# Altium PCB 板.PcbDoc (part 1 of 3)
Units mil, origin at the board's own origin, x right, y up, seen from the top; angles counter-clockwise.
Board outline 8500 x 4400 mil, 4 copper layers (Top Layer, 02gnd, 03vcc, Bottom Layer); 131 components, 485 nets, 1153 pads, 930 vias.
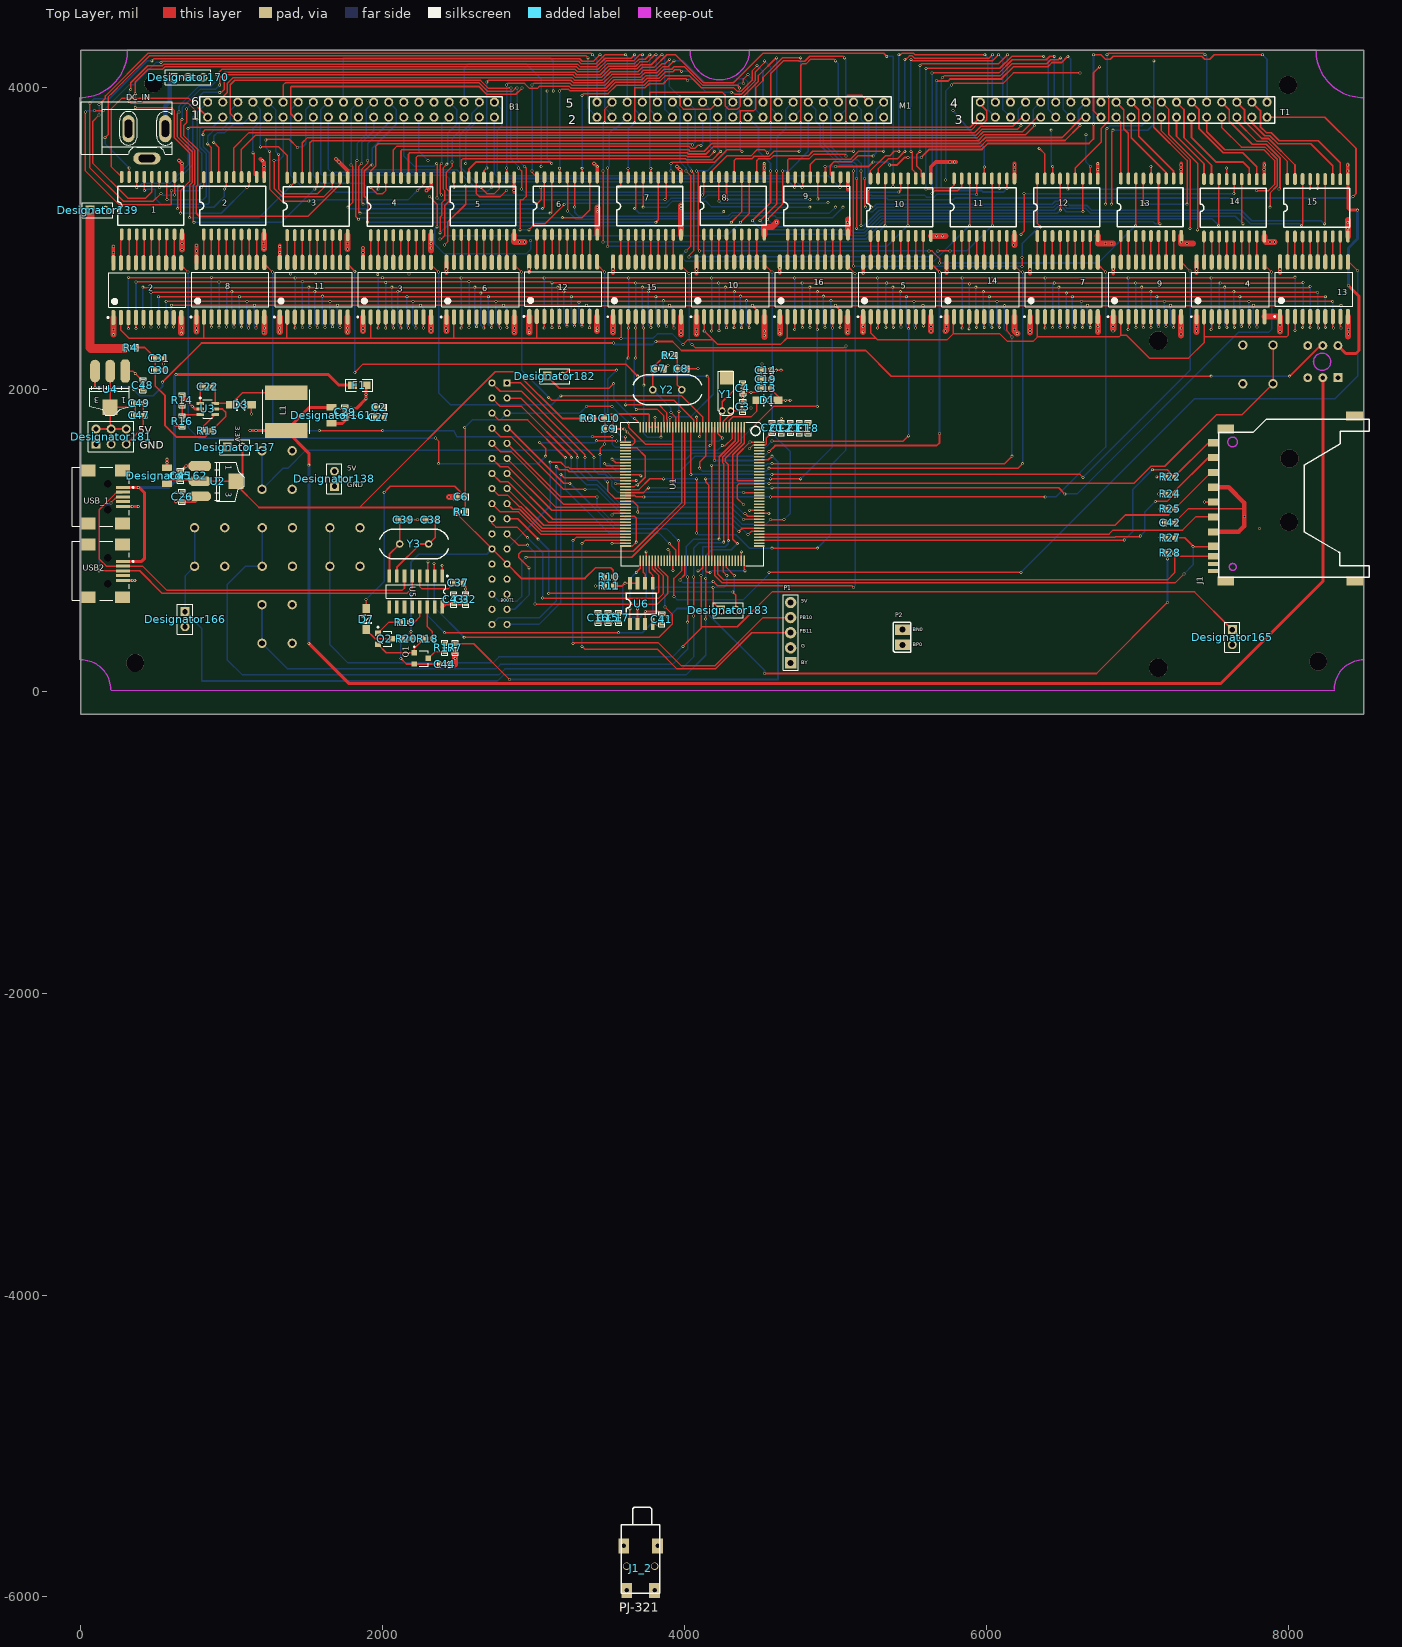
[diagram p0: Top Layer view]
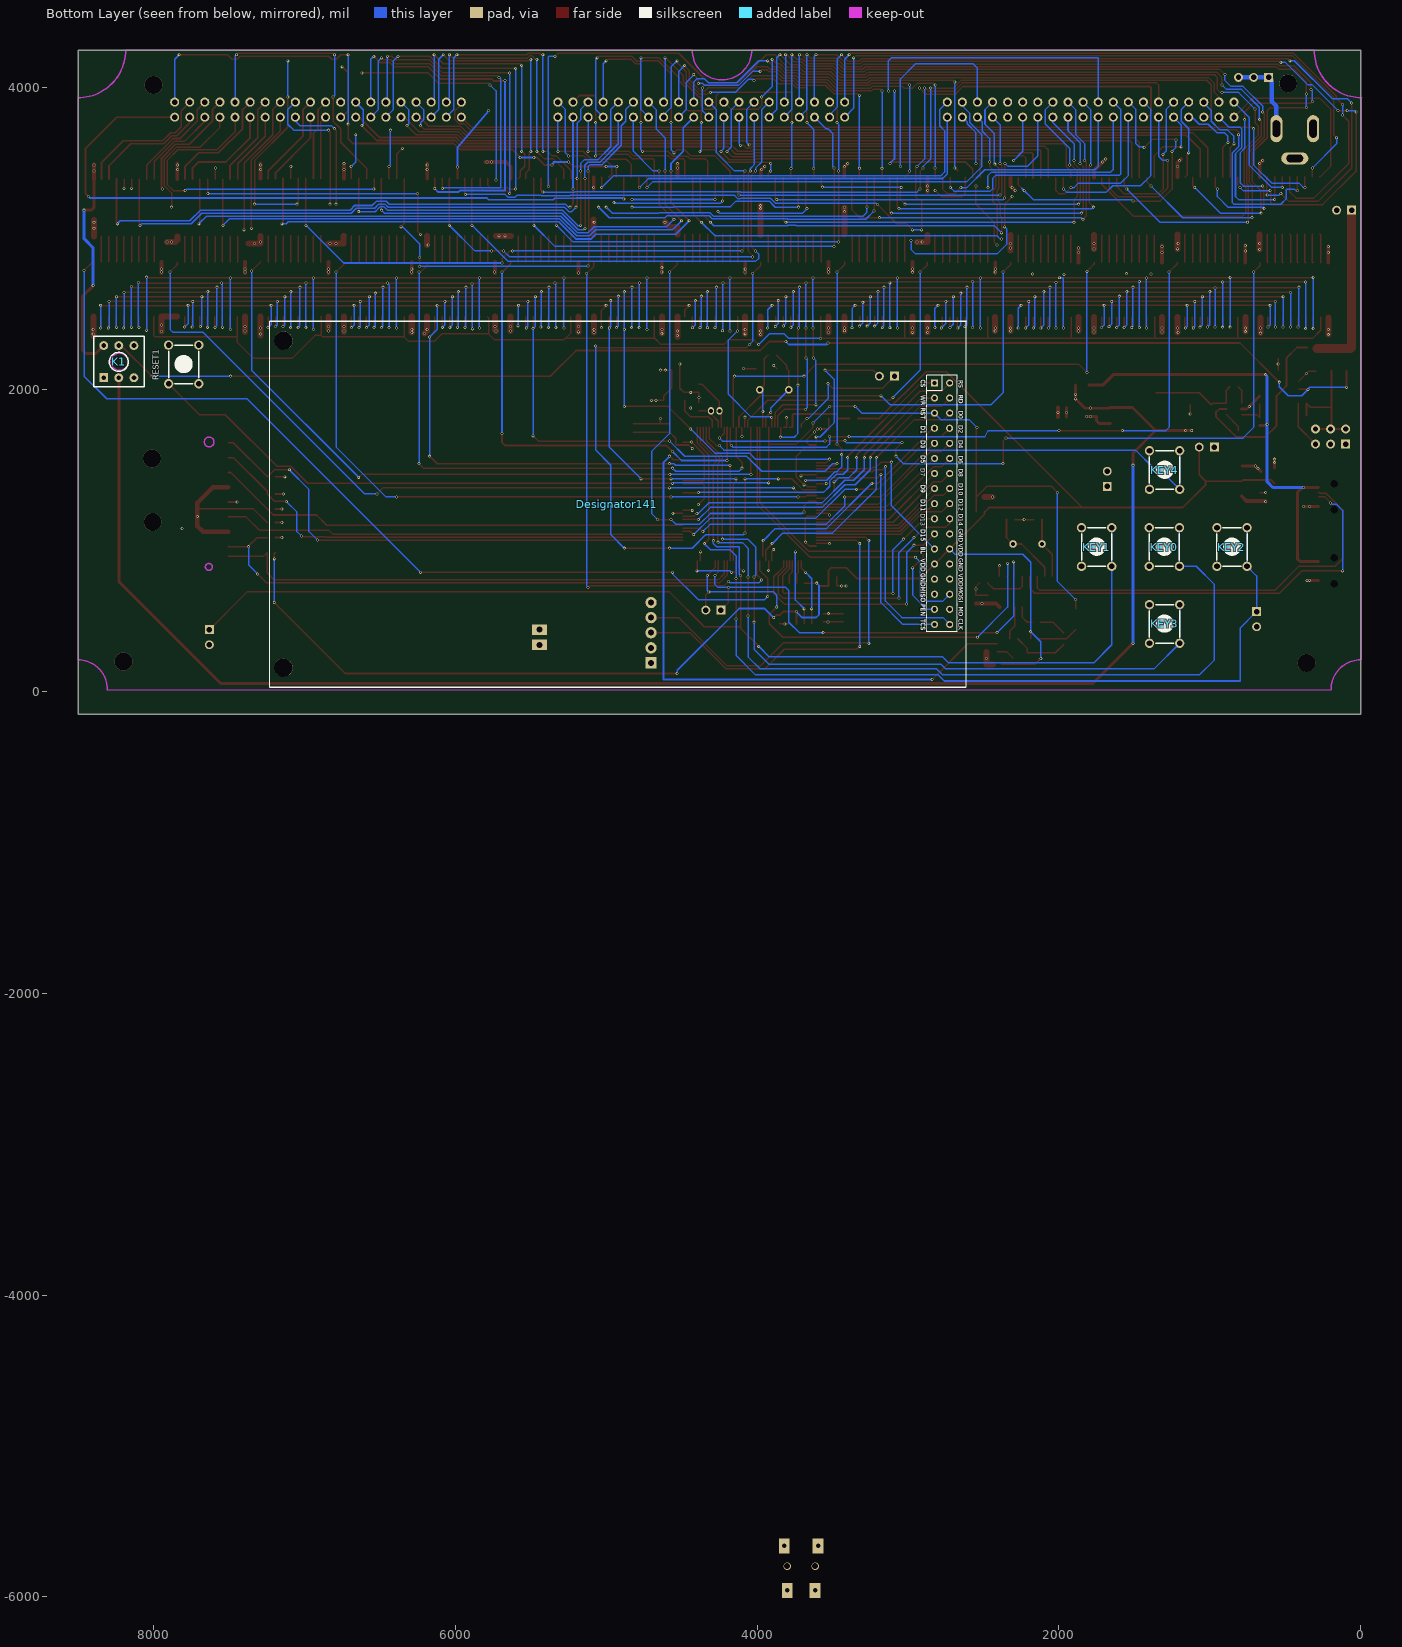
[diagram p1: Bottom Layer view, seen from below]
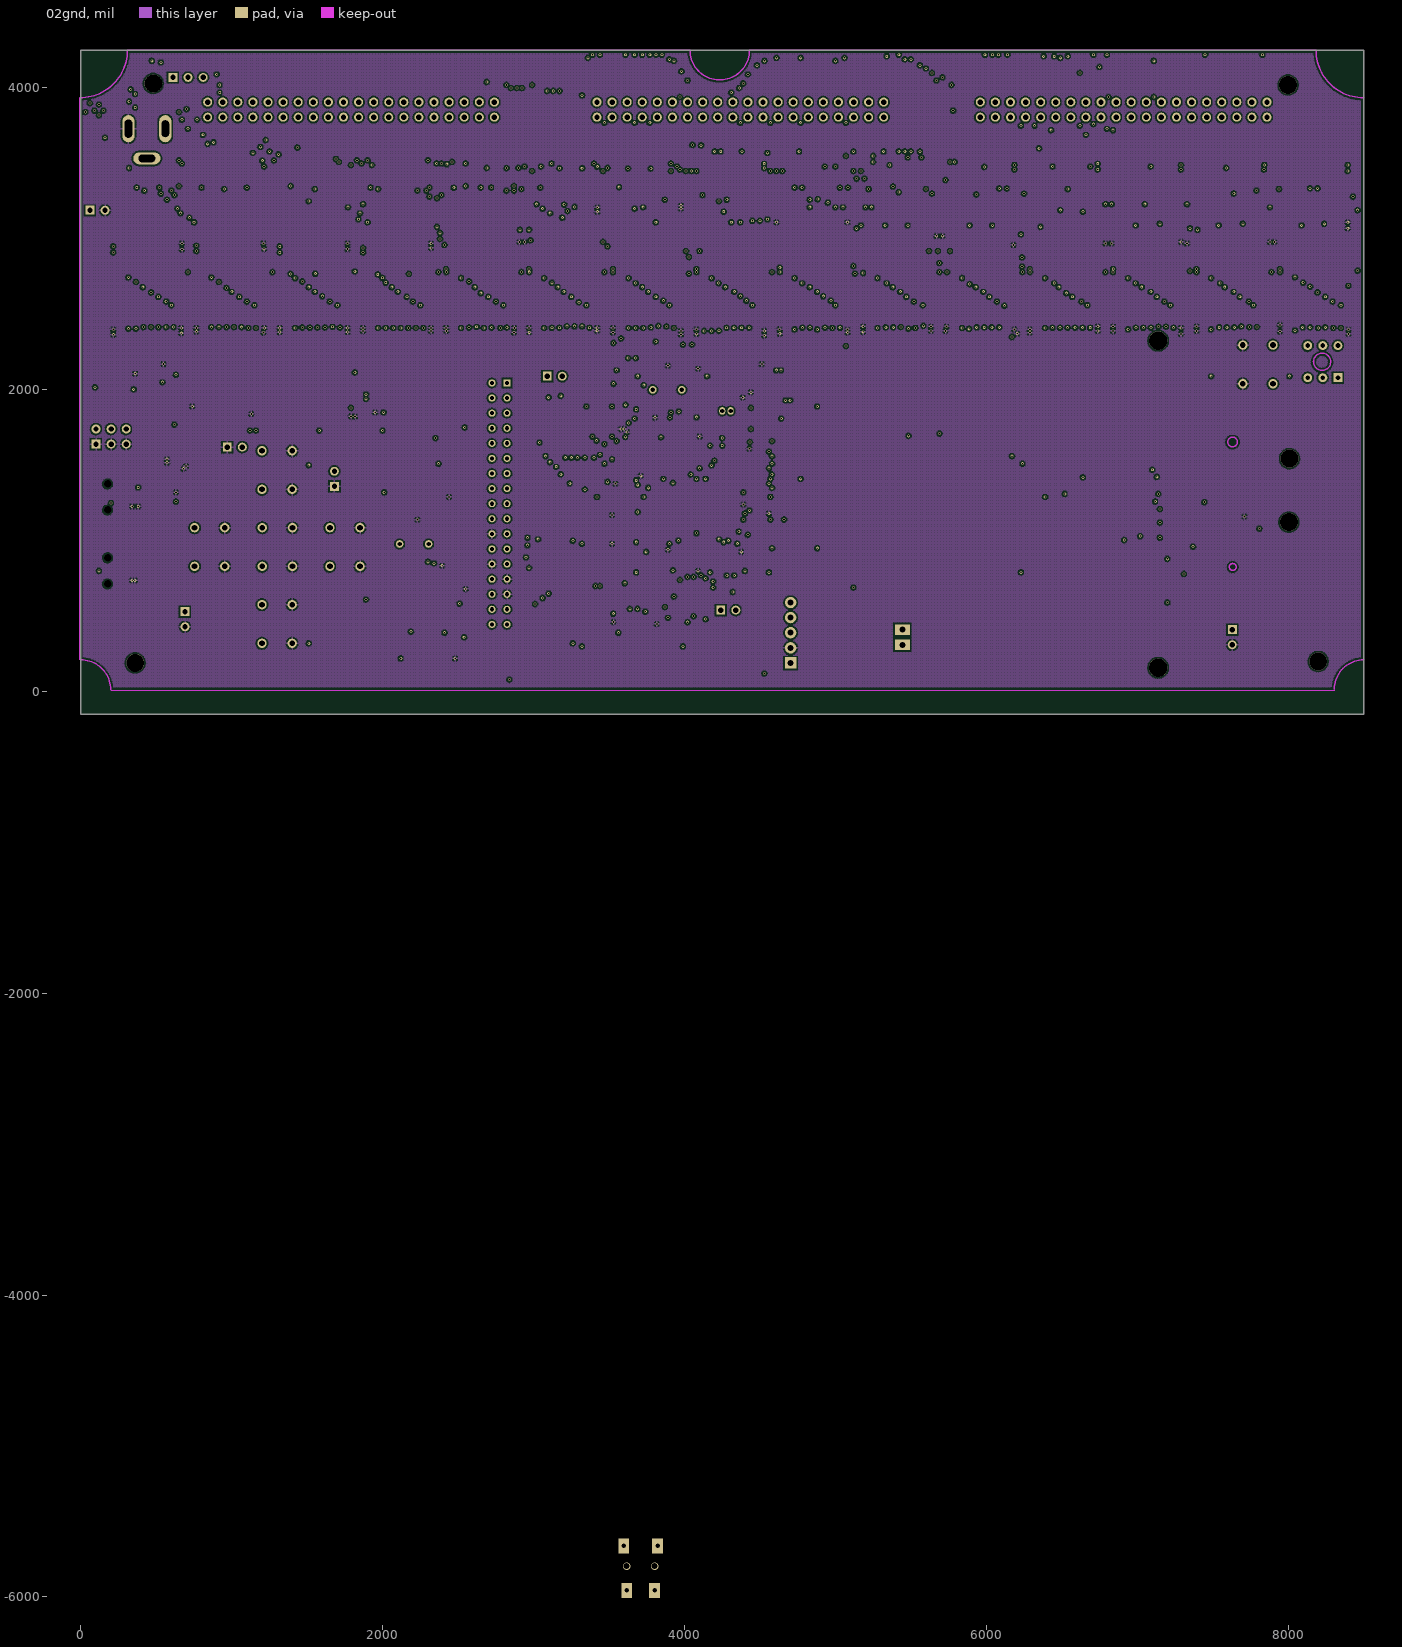
[diagram p2: 02gnd]
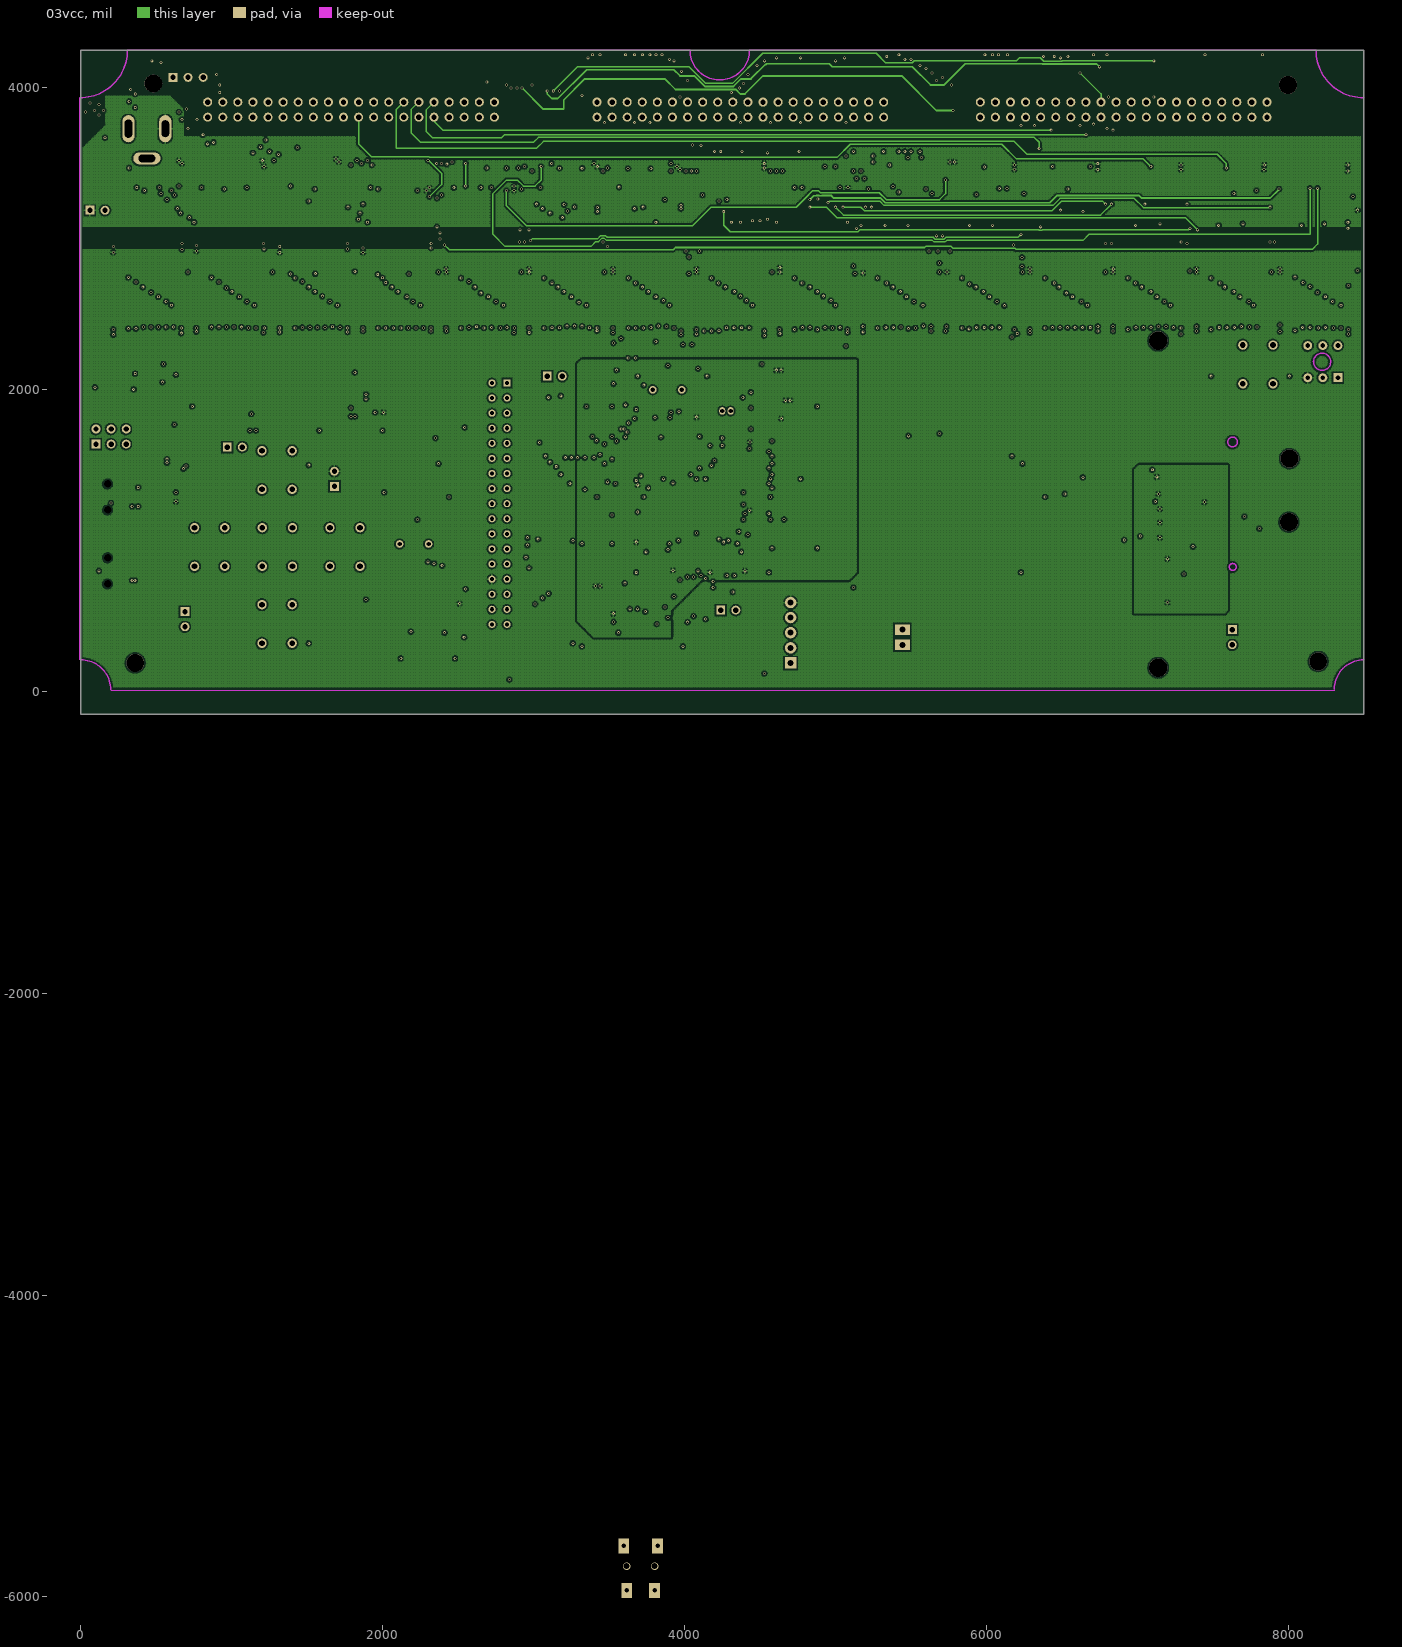
[diagram p3: 03vcc]

## Layer stack, top to bottom
Top Layer: signal copper 1.4
Dielectric: core 12.6, FR-4, Dk 4.8
02gnd: signal copper 1.4
Dielectric: prepreg 12.6, FR-4, Dk 4.8
03vcc: signal copper 1.4
Dielectric: core 12.6, FR-4, Dk 4.8
Bottom Layer: signal copper 1.4

## Board outline
0,4250 8500,4250 8500,-150 0,-150 0,4250

## Design rules (kind name [scope] priority, off if disabled: settings)
Clearance POLY [(INPolygon)] p1: gap=10
Clearance VIA-PLOY [(IsVia) vs INPOLY] p2: gap=5
Clearance ALL [All] p3: gap=4.5
ComponentClearance [All] p1: gap=0 collisioncheckmode=3 verticalgap=0 showdistances=FALSE
FabricationTestPointUsage TestPointUsage [All] p1: valid=0 allowmultiple=FALSE
FabricationTestpoint Testpoint [(IsPad And (OnTopLayer Or OnBottomLayer))] p1: side=3 testpointundercomponent=TRUE minsize=40 maxsize=100 preferedsize=60 minholesize=0 maxholesize=40 preferedholesize=32 testpointgrid=1 allowsidetop=TRUE allowsidebottom=TRUE usegrid=TRUE gridtolerance=0.01
PolygonConnect [All] p1: connectstyle=Relief reliefconductorwidth=10 reliefentries=4 polygonreliefangle="90 Angle" airgapwidth=10
RoutingCorners [All] p1: cornerstyle=Round minsetback=100 maxsetback=100
RoutingVias [All] p1: holewidth=11.81 width=19.68 viastyle="Through Hole" minholewidth=11.81 minwidth=19.68 maxholewidth=27.56 maxwidth=27.56
SolderMaskExpansion [All] p1: expansion=4
Width [All] p1: maxlimit=196.85 minlimit=10 preferedwidth=19.68 toplayer_prefwidth=10 midlayer1_maxwidth=118.11 midlayer2_maxwidth=118.11 bottomlayer_prefwidth=10 minimp=50.000000 maximp=50.000000 favimp=50.000000
24 further rules are at their usual default settings.

## Classes and differential pairs
component class SHEET2: 2 3 4 5 6 8 9 10 11 12 13 14 15 16
component class SHEET3: D3 D7 K1 L1 Q2
component class Sheet4: C41 C42 C44 KEY0 KEY1 KEY2 R22 R24 R25 R27 R28 U6
component class SHEET1: C2 C3 C4 C7 C8 C9 C10 C11 D1 R2 R3 Y1
net class POWER: NetD4_1 VBTN VCC3.3 VCC3.3M VCC5 VDDA VUSB

## Components (designator, comment, footprint, x,y, rotation, side; value= is the part's Value field where it differs from the comment)
1 "uln2803" sol-18 270,3030 r90 top (schematic designator FD1)
2 "74HC573" SO20_M 440,2660 r90 top
2 "uln2803" sol-18 814,3029 r90 top (schematic designator FD7)
3 "74HC573" SO20_M 2094.98,2662.99 r90 top
3 "uln2803" sol-18 1367,3025 r90 top (schematic designator FD10)
4 "74HC573" SO20_M 7618.56,2664.99 r90 top
4 "uln2803" sol-18 1921,3024 r90 top (schematic designator FD2)
5 "74HC573" SO20_M 5408.85,2664.99 r90 top
5 "uln2803" sol-18 2471,3027 r90 top (schematic designator FD5)
6 "74HC573" SO20_M 2647.41,2662.99 r90 top
6 "uln2803" sol-18 3022,3028 r90 top (schematic designator FD11)
7 "74HC573" SO20_M 6513.71,2664.99 r90 top
7 "uln2803" sol-18 3576.3,3027 r90 top (schematic designator FD14)
8 "74HC573" SO20_M 990.12,2662.99 r90 top
8 "uln2803" sol-18 4128.3,3029 r90 top (schematic designator FD9)
9 "74HC573" SO20_M 7066.13,2664.99 r90 top
9 "uln2803" sol-18 4683.3,3028 r90 top (schematic designator FD15)
10 "74HC573" SO20_M 4303.99,2664.99 r90 top
10 "uln2803" sol-18 5232.3,3020 r90 top (schematic designator FD4)
11 "74HC573" SO20_M 1542.55,2662.99 r90 top
11 "uln2803" sol-18 5786.3,3020 r90 top (schematic designator FD13)
12 "74HC573" SO20_M 3196,2667 r90 top
12 "uln2803" sol-18 6338.3,3019 r90 top (schematic designator FD6)
13 "74HC573" SO20_M 8171.3,2666 r90 top
13 "uln2803" sol-18 6891.3,3020 r90 top (schematic designator FD8)
14 "74HC573" SO20_M 5961.28,2664.99 r90 top
14 "uln2803" sol-18 7442.3,3016 r90 top (schematic designator FD3)
15 "74HC573" SO20_M 3751.56,2664.99 r90 top
15 "uln2803" sol-18 7995.3,3016 r90 top (schematic designator FD12)
16 "74HC573" SO20_M 4856.42,2664.99 r90 top
B1 "dubangxian" 杜邦线插脚 840,3906.42 r0 top
C2 "104" 0603P 1978.3,1883 r0 top
C3 "10" 0603P 4386.3,1887 r270 top
C4 "10" 0603P 4386.17,2010 r90 top
C6 "104" 0603P 2520,1290 r0 top
C7 "22" 0603P 3830,2140 r180 top
C8 "22" 0603P 3980,2140 r180 top
C9 "10uF" 0603P 3500,1740 r180 top
C10 "104" 0603P 3500,1810 r180 top
C11 "104" 0603P 4761.06,1746.5 r270 top
C12 "104" 0603P 4641.06,1746.5 r270 top
C13 "104" 0603P 4540,2010 r180 top
C14 "104" 0603P 4540,2130 r180 top
C15 "104" 0603P 3493.3,489 r270 top
C16 "104" 0603P 3428.3,489 r270 top
C17 "104" 0603P 3563.3,489 r270 top
C18 "104" 0603P 4821.06,1746.5 r270 top
C19 "104" 0603P 4540,2070 r180 top
C20 "104" 0603P 4581.06,1747.5 r270 top
C21 "104" 0603P 4700.06,1747.5 r270 top
C22 "103" 0603P 840,2020 r0 top
C26 "104" 0603P 670,1290 r270 top
C27 "104" 0603P 1978.3,1818 r0 top
C29 "104" 0603P 1750,1850 r90 top
C30 "10u" 0603P 520,2130 r180 top
C31 "104" 0603P 520,2210 r180 top
C32 "104" 0603P 2550,610 r90 top
C37 "104" 0603P 2500,720 r180 top
C38 "22" 0603P 2320,1140 r0 top
C39 "22" 0603P 2140,1140 r180 top
C41 "104" 0603P 3850,480 r270 top
C42 "104" 0603P 7220,1120 r180 top
C43 "10u" 0603P 2470,610 r90 top
C44 "104" 0603P 2410,180 r180 top
C45 "104" 0603P 660,1430 r270 top (schematic designator C26)
C47 "104" 0603P 386.7,1830 r0 top (schematic designator C26)
C48 "104" 0603P 410,2030 r90 top (schematic designator C26)
C49 "104" 0603P 386.7,1910 r0 top (schematic designator C26)
D1 "1N4148" DIODE_SOP 4620,1930 r180 top
D3 "SS14" DIODE_SOP 1130,1900 r180 top
D7 "1N4148" DIODE_SOP 1890,550 r270 top
DC_IN "POWER" DC10B 140,3560 r0 top
Designator137 "" HDR1X2#1 970,1620 r0 top
Designator138 "" HDR1X2#1 1680,1360 r90 top
Designator139 "" HDR1X2#1 60,3190 r0 top
Designator141 "" db2*17-4.3 2824.3,2045 r270 bottom locked
Designator161 "220uf钽电容" C1206 1660,1830 r270 top
Designator162 "220uf钽电容" C1206 570,1430 r90 top
Designator165 "" HDR1X2#1 7630,410 r270 top
Designator166 "" HDR1X2#1 690,530 r270 top
Designator170 "" HDR1X3 610,4070 r0 top
Designator181 "" HDR2X3 100,1640 r0 top
Designator182 "" HDR1X2#1 3090,2090 r0 top
Designator183 "" HDR1X2#1 4240,540 r0 top
F1 "1000mA" 0805 1800,2030 r0 top
J1 "SDCARD" SDCARD_L 7503.3,1550 r90 top
J1_2 "PJ-321" PCBComponent_1 32611.3,19659 r0 top (schematic designator J1)
K1 "BUTTON" BTN8.5*8.5 8330,2080 r90 bottom
KEY0 "KEY_M" KEY_M 1401.65,830 r90 bottom
KEY1 "KEY_M" KEY_M 1850,830 r90 bottom
KEY2 "KEY_M" KEY_M 953.3,830 r90 bottom
KEY3 "KEY_M" KEY_M 1400,320 r90 bottom (schematic designator KEY0)
KEY4 "KEY_M" KEY_M 1400,1340 r90 bottom (schematic designator KEY0)
L1 "4.7uH" L_SOP74 1360,1730 r90 top
M1 "dubangxian" 杜邦线插脚 3420,3906.42 r0 top
P1 "Header 5" HDR1X5 4703.3,190 r90 top locked
P2 "Header 2" HDR1X2#2 5443.3,410 r270 top locked
Q1 "S8550" SOT-23R 2250,220 r270 top
Q2 "S8050" SOT-23R 2010,350 r270 top
R1 "10K" 0603P 2520,1190 r180 top
R2 "1M" 0603P 3900,2230 r0 top
R3 "10R" 0603P 3360,1810 r180 top
R4 "0" 0603P 330,2280 r180 top (schematic designator R1)
R7 "10K" 0603P 2480,290 r270 top
R10 "0" 0603P 3500,760 r180 top
R11 "0" 0603P 3500,700 r180 top
R14 "9.53K" 0603P 670,1930 r90 top
R15 "100K" 0603P 840,1730 r180 top
R16 "49.9K" 0603P 670,1790 r90 top
R17 "1K" 0603P 2410,290 r90 top
R18 "1K" 0603P 2300,350 r180 top
R19 "1K" 0603P 2150,460 r180 top
R20 "10K" 0603P 2160,350 r180 top
R22 "47k" 0603P 7218.3,1423 r180 top
R24 "47k" 0603P 7220,1310 r180 top
R25 "47k" 0603P 7220,1210 r180 top
R27 "47k" 0603P 7220,1020 r180 top
R28 "47k" 0603P 7220,920 r180 top
RESET1 "KEY_M" KEY_M 7900,2040 r90 bottom
T1 "dubangxian" 杜邦线插脚 5960,3906.42 r0 top
U1 "STM32F103ZET6" LQFP144 4395.75,1751.68 r270 top
U2 "AMS1117-3.3" AMS1117 788.3,1494.03 r270 top
U3 "MP2359" SOT-23-6 790,1910 r0 top
U4 "AMS1117-3.3" AMS1117 294,2123.88 r180 top (schematic designator U2)
U5 "CH340G" SOP16M 2219.3,663 r180 top
U6 "W25Q128" SOIC-8 3638.3,448 r90 top
USB2 "USB" USB/SM0.8-6H5 -30,800 r180 top (schematic designator USB1)
USB_1 "USB" USB/SM0.8-6H5 -30,1290 r180 top
Y1 "32.768K" XTAL32 4250,1860 r90 top
Y2 "8MHz" XTAL_US 3790,2000 r0 top
Y3 "12.288MHz" XTAL_US 2304.3,978 r180 top

## Footprints (in the part's own frame and the unit in brackets; to place one, negate y for a bottom-side part, rotate by r counter-clockwise, add the part's x,y. Pads: shape width x height; smd on the part's side, far side on the other; paste and mask are expansions set on the pad)
0603P [mil]
  rect 30x30 smd: 1(-27,0) 2(27.5,-0.06)
  silkscreen extent -50,-20 50,20
0805 [mil]
  rect 60x50 smd: 1(0,0) 2(90,0)
  silkscreen extent -45,-40 135,40
AMS1117 [mil]
  oct 65x150 smd: 1(0.03,-0.06)
  oval 65x150 smd: 2(100.03,-0.06) 3(200.03,-0.06)
  rect 100x100 smd: 4(100.03,239.94)
  silkscreen extent -26,100 234,293
BTN8.5*8.5 [mm]
  rect 1.5x1.5 hole 0.8: 1(0,0)
  round 1.5 hole 0.8: 2(0,-2.54) 3(0,-5.08) 4(5.4,-5.08) 5(5.4,-2.54) 6(5.4,0)
  silkscreen extent -1.55,-6.79 6.95,1.71
C1206 [mm] "Chip Capacitor, Body 3.2x1.6mm, IPC High Density"
  rect 1.1x1.7 smd: 1(-1.35,0) 2(1.35,0)
  silkscreen extent -0.4,-0.75 0.4,0.75, body extent -1.7,-0.9 1.7,0.9, height 1.3
db2*17-4.3 [mm]
  rect 1.2x1.2 hole 0.7: 1(-0.002,0.006)
  round 1.2 hole 0.7: 2(-0.002,2.546) 3(2.538,0.006) 4(2.538,2.546) 5(5.08,0) 6(5.078,2.546) 7(7.62,0) 8(7.62,2.54) 9(10.158,0.006) 10(10.158,2.546) 11(12.698,0.006) 12(12.698,2.546) 13(15.238,0.006) 14(15.238,2.546) 15(17.778,0.006) 16(17.778,2.546) 17(20.318,0.006) 18(20.318,2.546) 19(22.858,0.006) 20(22.858,2.546) 21(25.398,0.006) 22(25.398,2.546) 23(27.938,0.006) 24(27.938,2.546) 25(30.478,0.006) 26(30.478,2.546) 27(33.018,0.006) 28(33.018,2.546) 29(35.558,0.006) 30(35.558,2.546) 31(38.098,0.006) 32(38.098,2.546) 33(40.638,0.006) 34(40.638,2.546)
  round 3.1 hole 3.1: ""(-7.125,-109.596) ""(47.925,-109.596)
  silkscreen extent -10.4,-111.89 51.25,5.33
DC10B [mil]
  oval 80x180 hole 50 slot 110 at 90 deg: 1(419.09,170)
  oval 80x180 hole 50 slot 120 at 90 deg: 2(175,170)
  oval 180x80 hole 50 slot 110 at 0 deg: 3(297.05,-26.85)
  silkscreen extent -138,0 465,350
DIODE_SOP [mm]
  rect 1.5x1.3 smd: 1(0,0) 2(3.556,0)
  silkscreen extent 1.14,-1.02 2.56,1.02
HDR1X2#1 [mm] "Connector; Header; 2 Position"
  rect 1.5x1.5 hole 0.9: 1(0,0)
  round 1.5 hole 0.9: 2(2.54,0)
  silkscreen extent -1.27,-1.27 3.81,1.27
HDR1X2#2 [mm]
  rect 1.778x2.54 hole 1.016: 1(0,0) 2(2.54,0)
  silkscreen extent -1.27,-1.27 3.81,1.27
HDR1X3 [mm] "Connector; Header; 3 Position"
  rect 1.5x1.5 hole 0.9: 1(0,0)
  round 1.5 hole 0.9: 2(2.54,0) 3(5.08,0)
  silkscreen extent -1.27,-1.27 6.35,1.27
HDR1X5 [mil]
  rect 75x75 hole 40: 1(0,0)
  round 75 hole 40: 2(100,0) 3(200,0) 4(300,0) 5(400,0)
  silkscreen extent -50,-50 450,50
HDR2X3 [mm] "Connector; Header; 3x2 Position"
  rect 1.5x1.5 hole 0.9: 1(0,0)
  round 1.5 hole 0.9: 2(0,2.54) 3(2.54,0) 4(2.54,2.54) 5(5.08,0) 6(5.08,2.54)
  silkscreen extent -1.27,-1.27 6.35,3.81
KEY_M [mil]
  round 62 hole 38: 1(0,0) 1(255.9,0) 2(0,-200) 2(255.9,-200)
  silkscreen extent 0,-200 255,0
L_SOP74 [mm]
  rect 2.5x7.2 smd: 1(0,0) 2(6.35,0)
  silkscreen extent -0.51,-3.94 6.89,3.94
LQFP144 [mil]
  rect 70.87x10 smd: 1(-0.35,0.02) 2(-0.35,-19.66) 3(-0.35,-39.35) 4(-0.35,-59.03) 5(-0.35,-78.72) 6(-0.35,-98.4) 7(-0.35,-118.09) 8(-0.35,-137.77) 9(-0.35,-157.46) 10(-0.35,-177.14) 11(-0.35,-196.83) 12(-0.35,-216.51) 13(-0.35,-236.2) 14(-0.35,-255.88) 15(-0.35,-275.57) 16(-0.35,-295.25) 17(-0.35,-314.94) 18(-0.35,-334.62) 19(-0.35,-354.31) 20(-0.35,-373.99) 21(-0.35,-393.68) 22(-0.35,-413.36) 23(-0.35,-433.05) 24(-0.35,-452.73) 25(-0.35,-472.42) 26(-0.35,-492.1) 27(-0.35,-511.79) 28(-0.35,-531.47) 29(-0.35,-551.16) 30(-0.35,-570.84) 31(-0.35,-590.53) 32(-0.35,-610.21) 33(-0.35,-629.9) 34(-0.35,-649.58) 35(-0.35,-669.27) 36(-0.35,-688.95) 73(885.47,-688.95) 74(885.47,-669.27) 75(885.47,-649.58) 76(885.47,-629.9) 77(885.47,-610.21) 78(885.47,-590.53) 79(885.47,-570.84) 80(885.47,-551.16) 81(885.47,-531.47) 82(885.47,-511.79) 83(885.47,-492.1) 84(885.47,-472.42) 85(885.47,-452.73) 86(885.47,-433.05) 87(885.47,-413.36) 88(885.47,-393.68) 89(885.47,-373.99) 90(885.47,-354.31) 91(885.47,-334.62) 92(885.47,-314.94) 93(885.47,-295.25) 94(885.47,-275.57) 95(885.47,-255.88) 96(885.47,-236.2) 97(885.47,-216.51) 98(885.47,-196.83) 99(885.47,-177.14) 100(885.47,-157.46) 101(885.47,-137.77) 102(885.47,-118.09) 103(885.47,-98.4) 104(885.47,-78.72) 105(885.47,-59.03) 106(885.47,-39.35) 107(885.47,-19.66) 108(885.47,0.02)
  rect 10x70.87 smd: 37(98.07,-787.38) 38(117.76,-787.38) 39(137.44,-787.38) 40(157.13,-787.38) 41(176.81,-787.38) 42(196.5,-787.38) 43(216.18,-787.38) 44(235.87,-787.38) 45(255.55,-787.38) 46(275.24,-787.38) 47(294.92,-787.38) 48(314.61,-787.38) 49(334.29,-787.38) 50(353.98,-787.38) 51(373.66,-787.38) 52(393.35,-787.38) 53(413.03,-787.38) 54(432.72,-787.38) 55(452.4,-787.38) 56(472.09,-787.38) 57(491.77,-787.38) 58(511.46,-787.38) 59(531.14,-787.38) 60(550.83,-787.38) 61(570.51,-787.38) 62(590.2,-787.38) 63(609.88,-787.38) 64(629.57,-787.38) 65(649.25,-787.38) 66(668.94,-787.38) 67(688.62,-787.38) 68(708.31,-787.38) 69(727.99,-787.38) 70(747.68,-787.38) 71(767.36,-787.38) 72(787.05,-787.38) 109(787.05,98.45) 110(767.36,98.45) 111(747.68,98.45) 112(727.99,98.45) 113(708.31,98.45) 114(688.62,98.45) 115(668.94,98.45) 116(649.25,98.45) 117(629.57,98.45) 118(609.88,98.45) 119(590.2,98.45) 120(570.51,98.45) 121(550.83,98.45) 122(531.14,98.45) 123(511.46,98.45) 124(491.77,98.45) 125(472.09,98.45) 126(452.4,98.45) 127(432.72,98.45) 128(413.03,98.45) 129(393.35,98.45) 130(373.66,98.45) 131(353.98,98.45) 132(334.29,98.45) 133(314.61,98.45) 134(294.92,98.45) 135(275.24,98.45) 136(255.55,98.45) 137(235.87,98.45) 138(216.18,98.45) 139(196.5,98.45) 140(176.81,98.45) 141(157.13,98.45) 142(137.44,98.45) 143(117.76,98.45) 144(98.07,98.45)
  silkscreen extent -32,-819 917,130
PCBComponent_1 [mil]
  rect 70.87x98.43 hole 30: 2(-28995,-25615) 3(-28810,-25615) 4(-29015,-25320) 4(-28790,-25320)
  silkscreen extent -29030,-25635 -28775,-25065
SDCARD_L [mm]
  rect 1.2x1.8 smd: 1(0,0) 2(-2.489,0) 3(-4.983,-0.009) 4(-7.483,-0.009) 5(-9.983,-0.009) 6(-12.483,-0.009) 7(-14.908,-0.009) 9(2.517,-0.009)
  rect 1.1x1.8 smd: 8(-16.612,0)
  rect 0.7x1.8 smd: 10(-17.908,-0.009) 12(-19.101,0)
  rect 1.5x2.8 smd: 11(-20.726,-2.143) 11(-20.726,-23.834) 11(4.826,-2.143) 11(7.01,-23.784)
  Keep-Out Layer circle w0.254: c2.642,-3.26 r0.82
  Keep-Out Layer circle w0.254: c-18.39,-3.3 r0.58
  silkscreen extent -20.13,-26.3 6.44,-0.9
SO20_M [mm] "SOIC, 20-Leads, Body 12.8x7.5mm, Pitch 1.27mm, IPC Low Density"
  oval 2.6x0.7 smd: 1(-4.6,5.715) 2(-4.6,4.445) 3(-4.6,3.175) 4(-4.6,1.905) 5(-4.6,0.635) 6(-4.6,-0.635) 7(-4.6,-1.905) 8(-4.6,-3.175) 9(-4.6,-4.445) 10(-4.6,-5.715) 11(4.6,-5.715) 12(4.6,-4.445) 13(4.6,-3.175) 14(4.6,-1.905) 15(4.6,-0.635) 16(4.6,0.635) 17(4.6,1.905) 18(4.6,3.175) 19(4.6,4.445) 20(4.6,5.715)
  silkscreen extent -4.72,-6.5 2.9,6.74, body extent -3.75,-6.5 3.75,6.5, height 2.65
SOIC-8 [mil]
  rect 80x24 smd: 1(0,0) 2(0,-50.06) 3(0,-100.06) 4(0,-150.06) 5(270,-150) 6(270,-100) 7(270,-50) 8(270,0)
  silkscreen extent 65,-175 205,25
sol-18 [mil]
  oval 80x24 smd: 1(0,0) 2(0,-50) 3(0,-100) 4(0,-150) 5(0,-200) 6(0,-250) 7(0,-300) 8(0,-350) 9(0,-400) 10(380,-400) 11(380,-350) 12(380,-300) 13(380,-250) 14(380,-200) 15(380,-150) 16(380,-100) 17(380,-50) 18(380,0)
  silkscreen extent 60,-412 320,25
SOP16M [mm]
  rect 0.6x2.2 smd: 1(-4.445,-2.6) 2(-3.175,-2.6) 3(-1.905,-2.6) 4(-0.635,-2.6) 5(0.635,-2.6) 6(1.905,-2.6) 7(3.175,-2.6) 8(4.445,-2.6) 9(4.445,2.6) 10(3.175,2.6) 11(1.905,2.6) 12(0.635,2.6) 13(-0.635,2.6) 14(-1.905,2.6) 15(-3.175,2.6) 16(-4.445,2.6)
  silkscreen extent -5.42,-2.72 5,1.1
SOT-23-6 [mil]
  rect 50x20 smd: 1(0,0) 2(0,-37.4) 3(0,-74.8) 4(100,-74.8) 5(100,-37.4) 6(100,0)
  silkscreen extent 0,-99 80,35
SOT-23R [mm]
  rect 0.9x0.95 smd: 1(0.95,-1.048) 2(-0.95,-1.048) 3(0,1.302)
  silkscreen extent -2.07,-1.17 1.3,1.3
USB/SM0.8-6H5 [mm]
  rect 2.3x0.5 smd: 1(-7.85,-1.6) 2(-7.85,-0.8) 3(-7.85,0) 4(-7.85,0.8) 5(-7.85,1.6)
  rect 2.5x2 smd: 6(-7.75,4.45) 7(-1.996,4.45) 8(-7.75,-4.45) 9(-1.996,-4.45)
  round 0.6 hole 1.27 unplated: MH1(-5.25,2.2) MH2(-5.25,-2.2)
  silkscreen extent -9.68,-4.95 0.7,4.95
XTAL32 [mil]
  oval 50x40 hole 27.99: 1(0,0.01) 2(0,-56.02)
  rect 92.13x86 smd: ""(220,-27)
  silkscreen extent -28,-77 264,25
XTAL_US [mil]
  round 50 hole 28: 1(0,0) 2(192.13,0)
  silkscreen extent -131,-98 323,98
杜邦线插脚 [mil]
  round 60 hole 36: 1(0,-100) 2(100,-100) 3(200,-100) 4(300,-100) 5(400,-100) 6(500,-100) 7(600,-100) 8(700,-100) 9(800,-100) 10(900,-100) 11(1000,-100) 12(1100,-100) 13(1200,-100) 14(1300,-100) 15(1400,-100) 16(1500,-100) 17(1600,-100) 18(1700,-100) 19(1800,-100) 20(1900,-100) 21(0,0) 22(100,0) 23(200,0) 24(300,0) 25(400,0) 26(500,0) 27(600,0) 28(700,0) 29(800,0) 30(900,0) 31(1000,0) 32(1100,0) 33(1200,0) 34(1300,0) 35(1400,0) 36(1500,0) 37(1600,0) 38(1700,0) 39(1800,0) 40(1900,0)
  silkscreen extent -53,-142 1951,35

## Part data
2 3 4 5 6 7 8 9 10 11 12 13 14 15 16: library part SN74HC573DW, "Octal D-Type Transparent Latch with 3-State Outputs"
C2 C3 C4 C6 C7 C8 C9 C10 C11 C12 C13 C14 C15 C16 C17 C18 C19 C20 C21 C22 C26 C27 C29 C30 C31 C32 C37 C38 C39 C41 C42 C43 C44 C45 C47 C48 C49: library part C
D1: library part D, "Typical RED, GREEN, YELLOW, AMBER GaAs LED"
D3 D7: library part D
DC_IN: library part POW
F1 R1 R2 R3 R4 R7 R10 R11 R14 R15 R16 R17 R18 R19 R20: library part R
J1: "SD卡自弹"
L1: library part L_SOP
Q1: library part PNP, "8550/BCW68"
Q2: library part NPN, "8050/BCW846/BCW847"
R22 R24 R25 R27 R28: library part Res1, "贴片电阻"
U2 U4: library part AMS1117
U3: "DC DC Step Down IC"
U5: "USB2UART"
U6: library part W25X16, "W25X16;SST25VF016;MX25L1605"
USB2 USB_1: library part USB5
Y1: library part XTAL_1, "Crystal Oscillator"
Y2: library part XTAL, "Crystal Oscillator"
Y3: library part XTAL_2, "Crystal Oscillator"

## Free pads (board coordinates)
  round 118.11 hole 118: 3(360,190) 3(480,4030)

## Via types
v1: diameter 19.68, hole 11.81, Top Layer to Bottom Layer, 922 vias
v2: diameter 118.11, hole 118.11, Top Layer to Bottom Layer, tented both sides, 4 vias
v3: diameter 50, hole 40, Top Layer to Bottom Layer, 2 vias
v4: diameter 39.37, hole 39.37, Top Layer to Bottom Layer, 2 vias

## Nets (pads, with @x,y where several pads share a name; then routed paths per layer and width w, separated by ;. In a path a pad name is that pad's centre, name@x,y a point inside that pad or via, vN(x,y) a via of type N, cw(c..) or ccw(c..) an arc to the next point about the centre after c; other vN are vias at no path point)
5V: C47.1 C49.1 Designator181.2 Designator181.4 Designator181.6 U4.2 U4.4 | length 843
  Top Layer w11.81: Designator181.2@100,1740 Designator181.4@200,1740 ; U4.2@193.97,2123.95 U4.4@193.97,1883.94 ; Designator181.6@300,1740 Designator181.4@200,1740 ; C47.1@359.7,1830 C49.1@359.7,1910 333.65,1883.94 U4.4@193.97,1883.94 ; U4.4@193.97,1883.94 193.97,1746.03 Designator181.4@200,1740
"A OUTL": 
"A OUTR": 
AREF: 
"ASEL A": 
"ASEL B": U1.137
AVDD: 
B0: 
B1: 
BEEP: U1.139
BN0: P2.1
BOOT0: R7.1 R17.2 U1.138 | length 3900.1
  Top Layer w11.81: R17.2@2410.06,317.5 R7.1@2479.5,317.5 ; R7.1@2480,317 2603,317 v1(2840,80) ; U1.138@4494.2,1535.5 4555.5,1535.5 v1(4580,1560)
  Bottom Layer w11.81: v1(2840,80) 4620,80 4620,1520 v1(4580,1560)
BOOT1: 
BP0: P2.2
"CAN RX": 
"CAN TX": 
"CD X0": 
"CD X1": 
"CD XY2": 
"CD Y0": 
"CD Y1": 
"CH340 D+": U5.5 USB2.3 USB_1.3 | length 2827.2
  Top Layer w10: v1(120,800) USB2.3@279.06,800 390,800 537.87,652.13 2160.72,652.13 2194.3,685.7 U5.5@2194.3,765.36 ; v1(200,1250) 200,1252.77 237.23,1290 USB_1.3@279.06,1290
  Bottom Layer w10: v1(120,800) 120,1200.26 161,1241.26 191.26,1241.26 v1(200,1250)
"CH340 D-": U5.6 USB2.2 USB_1.2 | length 2729.3
  Top Layer w10: USB_1.2@279.06,1321.5 270.28,1312.72 228.45,1312.72 120,1204.27 120,880 168.5,831.5 USB2.2@279.06,831.5 408.5,831.5 570,670 2128.6,670 2144.3,685.7 U5.6@2144.3,765.36
CVDD: 
D1: 2.2@265,2478.9 3.2@1919.98,2481.89 4.2@7443.56,2483.89 5.2@5233.85,2483.89 6.2@2472.41,2481.89 7.2@6338.71,2483.89 8.2@815.12,2481.89 9.2@6891.13,2483.89 10.2@4128.99,2483.89 11.2@1367.55,2481.89 12.2@3021,2485.9 13.2@7996.3,2484.9 14.2@5786.28,2483.89 15.2@3576.56,2483.89 16.2 U1.26 | length 10966.1
  Top Layer w10: 2.2@265,2478.9 265,2395 320,2340 815,2340 ; 8.2@815.12,2481.89 815.12,2390.12 815,2390 815,2340 ; 11.2@1367.55,2481.89 1364.88,2479.22 1364.88,2340 ; 1919.98,2340 3.2@1919.98,2481.89 ; 6.2@2472.41,2481.89 2470.22,2479.7 2470.22,2340 ; 12.2@3021,2485.9 3020.22,2485.12 3020.22,2340 ; 15.2@3576.56,2483.89 3579.78,2480.67 v1(3579.78,2340) 3020.22,2340 ; U1.26@3903.65,1752.03 v1(3903.65,1816.35) ; v1(3990,2300) 4020,2330 4190,2330 ; 10.2@4128.99,2483.89 10.2@4130,2482.88 ; 10.2@4130,2483.89 10.2@4130,2482.88 ; 16.2@4681.42,2483.89 4681.42,2344.73 ; 5.2@5233.85,2483.89 5233.85,2376.15 5270,2340 ; 14.2@5786.28,2483.89 5780,2477.61 5780,2370 ; 7.2@6338.71,2483.89 6338.71,2351.29 6340,2350 ; 9.2@6891.13,2483.89 6890,2482.76 6890,2360 ; 4.2@7443.56,2483.89 7443.56,2350 ; 13.2@7996.3,2484.9 8000,2481.2 8000,2360 7990,2350 7443.56,2350 ; 815,2340 1364.88,2340 ; 1364.88,2340 2470.22,2340 ; 2470.22,2340 3020.22,2340 ; 10.2@4130,2482.88 v1(4130,2390) 4190,2330 ; 4190,2330 4220,2300 4636.69,2300 4681.42,2344.73 ; 4681.42,2344.73 4686.15,2340 5270,2340 ; 5270,2340 5280,2330 5740,2330 5780,2370 ; 5780,2370 6090,2370 6140,2320 6310,2320 6340,2350 ; 6340,2350 6880,2350 6890,2360 ; 6890,2360 6930,2360 7080,2210 7340,2210 7443.56,2313.56 7443.56,2350
  Bottom Layer w10: v1(3579.78,2340) 3790,2340 3820,2370 3920,2370 v1(3990,2300) ; v1(3903.65,1816.35) 3907.3,1820 4040,1820 4190,1970 4190,2330 v1(4130,2390)
D2: 2.3@315,2478.9 3.3@1969.98,2481.89 4.3@7493.56,2483.89 5.3@5283.85,2483.89 6.3@2522.41,2481.89 7.3@6388.71,2483.89 8.3@865.12,2481.89 9.3@6941.13,2483.89 10.3@4178.99,2483.89 11.3@1417.55,2481.89 12.3@3071,2485.9 13.3@8046.3,2484.9 14.3@5836.28,2483.89 15.3@3626.56,2483.89 16.3 U1.27 | length 14862.5
  Top Layer w10: v1(315,2405) 2.3@315,2478.9 ; v1(315,2745) 317.72,2742.28 v1(1997.72,2742.28) v1@8042.28,2742.28 ; v1(865.12,2414.88) 8.3@865.12,2481.89 ; v1@1417.55,2412.45 11.3@1417.55,2481.89 ; v1(1970,2410) 3.3@1969.98,2481.89 ; v1@2522.41,2410 6.3@2522.41,2481.89 ; v1@3071,2411 12.3@3071,2485.9 ; v1(3610,1900) 3830,1900 3880.93,1849.07 3880.93,1806.94 3883.96,1803.91 U1.27@3883.96,1752.03 ; v1(3626.56,2210) 3626.56,2406.56 v1(3630,2410) v1@3630,2416.56 ; v1@3626.56,2416.56 15.3@3626.56,2483.89 ; v1@4178.99,2391.01 10.3@4178.99,2483.89 ; v1@4731.42,2401.42 16.3@4731.42,2483.89 ; v1@5283.85,2410 5.3@5283.85,2483.89 ; 14.3@5836.28,2483.89 5840,2480.17 v1(5840,2410) ; v1@6388.71,2411.29 7.3@6388.71,2483.89 ; v1@6941.13,2401.13 9.3@6941.13,2483.89 ; v1(7490,2400) 7493.56,2403.56 4.3@7493.56,2483.89 ; v1(8046.3,2393.7) 13.3@8046.3,2484.9
  Bottom Layer w10: v1(315,2405) v1(315,2745) ; v1(865.12,2414.88) v1(865.12,2745.12) ; v1(1420,2410) v1(1420,2740) ; v1(1970,2410) 1970,2742.28 v1(1997.72,2742.28) v1@2000,2740 ; v1(2520,2410) v1(2520,2740) ; v1(3070,2410) v1(3070,2740) ; v1(3610,1900) 3610,2193.44 v1(3626.56,2210) ; v1(3630,2410) v1(3630,2740) ; v1(4180,2390) v1(4180,2740) ; v1(4730,2400) v1(4730,2740) ; v1(5280,2410) v1(5280,2740) ; v1(5840,2410) v1(5840,2740) ; v1(6390,2410) v1(6390,2740) ; v1(6940,2400) v1(6940,2740) ; v1(7490,2400) v1(7490,2740) ; v1(8046.14,2746.14) 8046.3,2745.98 v1(8046.3,2393.7)
D3: 2.4@365,2478.9 3.4@2019.98,2481.89 4.4@7543.56,2483.89 5.4@5333.85,2483.89 6.4@2572.41,2481.89 7.4@6438.71,2483.89 8.4@915.12,2481.89 9.4@6991.13,2483.89 10.4@4228.99,2483.89 11.4@1467.55,2481.89 12.4@3121,2485.9 13.4@8096.3,2484.9 14.4@5886.28,2483.89 15.4@3676.56,2483.89 16.4 U1.28 | length 14168.3
  Top Layer w10: v1(365,2405) 2.4@365,2478.9 ; v1(365,2715) v1@3115,2715 ; v1(915.12,2414.88) 8.4@915.12,2481.89 ; v1(1467.55,2412.45) 11.4@1467.55,2481.89 ; v1(2019.98,2410.02) 3.4@2019.98,2481.89 ; v1(2572.41,2412.41) 6.4@2572.41,2481.89 ; v1(3121,2411) 12.4@3121,2485.9 ; v1(3121,2709) v1@3679,2709 ; v1(3676.56,2210) v1(3676.56,2410) 15.4@3676.56,2483.89 ; v1(3676.56,2706.56) v1(4226.56,2706.56) v1(4780,2706.56) v1(5340,2706.56) 5883.44,2706.56 v1(5890,2700) ; v1(3680,1870) 3820,1870 3863.06,1826.94 3863.06,1753.25 U1.28@3864.28,1752.03 ; v1(4228.99,2391.01) 10.4@4228.99,2483.89 ; v1(4781.42,2411.42) 16.4@4781.42,2483.89 ; v1(5333.85,2413.85) 5.4@5333.85,2483.89 ; v1(5886.28,2403.72) 14.4@5886.28,2483.89 ; v1@5890,2706.56 v1(6450,2706.56) v1(6990,2706.56) v1(7550,2706.56) v1@8096.56,2706.56 ; v1(6438.71,2411.29) 7.4@6438.71,2483.89 ; v1(6991.13,2411.13) 9.4@6991.13,2483.89 ; v1(7543.56,2413.56) 4.4@7543.56,2483.89 ; v1(8096.3,2413.7) 13.4@8096.3,2484.9
  Bottom Layer w10: v1(365,2405) v1(365,2715) ; v1(915.12,2414.88) v1(915.12,2714.88) ; v1(1467.55,2412.45) v1(1467.55,2717.55) ; v1(2019.98,2410.02) v1(2019.98,2709.98) ; v1(2572.41,2412.41) v1(2572.41,2717.59) ; v1(3121,2411) v1(3121,2709) ; v1(3676.56,2210) 3667.28,2200.72 3667.28,1882.72 v1(3680,1870) ; v1(3676.56,2410) v1(3676.56,2706.56) ; v1(4226.56,2706.56) 4228.99,2704.14 v1(4228.99,2391.01) ; v1(4780,2706.56) 4781.42,2705.14 v1(4781.42,2411.42) ; v1(5333.85,2413.85) 5333.85,2700.41 v1(5340,2706.56) ; v1(5886.28,2403.72) 5886.28,2696.28 v1(5890,2700) ; v1(6438.71,2411.29) 6438.71,2695.27 v1(6450,2706.56) ; v1(6991.13,2411.13) v1@6991.13,2706.74 ; v1(7543.56,2413.56) 7543.56,2700.13 v1(7550,2706.56) ; v1(8096.3,2413.7) 8100,2417.4 v1(8100,2710)
D4: 2.5@415,2478.9 3.5@2069.98,2481.89 4.5@7593.56,2483.89 5.5@5383.85,2483.89 6.5@2622.41,2481.89 7.5@6488.71,2483.89 8.5@965.12,2481.89 9.5@7041.13,2483.89 10.5@4278.99,2483.89 11.5@1517.55,2481.89 12.5@3171,2485.9 13.5@8146.3,2484.9 14.5@5936.28,2483.89 15.5@3726.56,2483.89 16.5 U1.29 | length 13756.3
  Top Layer w10: v1(410,2680) 412.72,2677.28 8139.88,2677.28 v1(8146.3,2683.7) ; v1(415,2415) 2.5@415,2478.9 ; v1(965.12,2415.12) 8.5@965.12,2481.89 ; v1(1517.55,2412.45) 11.5@1517.55,2481.89 ; v1(2069.98,2410.02) 3.5@2069.98,2481.89 ; v1(2622.41,2417.59) 6.5@2622.41,2481.89 ; v1(3171,2411) 12.5@3171,2485.9 ; 15.5@3726.56,2500 15.5@3726.56,2483.89 v1(3726.56,2410) 3730,2406.56 v1(3730,2030) ; v1(3844.59,1685.41) U1.29@3844.59,1752.03 ; v1(4278.99,2411.01) 10.5@4278.99,2483.89 ; v1(4831.42,2411.42) 16.5@4831.42,2483.89 ; v1(5383.85,2413.85) 5.5@5383.85,2483.89 ; v1(5936.28,2413.72) 14.5@5936.28,2483.89 ; v1(6488.71,2411.29) 7.5@6488.71,2483.89 ; v1(7041.13,2411.13) 9.5@7041.13,2483.89 ; v1(7593.56,2413.56) 4.5@7593.56,2483.89 ; v1(8146.3,2413.7) 13.5@8146.3,2484.9
  Bottom Layer w10: v1(410,2680) 410,2420 v1(415,2415) ; v1(965.12,2415.12) v1(965.12,2674.88) ; v1(1510,2680) 1510,2420 v1(1517.55,2412.45) ; v1(2060,2680) 2060,2420 v1(2069.98,2410.02) ; v1(2610,2680) 2610,2430 v1(2622.41,2417.59) ; v1(3160,2680) 3160,2422 v1(3171,2411) ; v1(3720,2680) 3720,2416.56 v1(3726.56,2410) ; v1(3730,2030) 3730,1710 3754.59,1685.41 v1(3844.59,1685.41) ; v1(4270,2680) 4270,2420 v1(4278.99,2411.01) ; v1(4831.42,2411.42) v1@4831.42,2678.58 ; v1(5380,2680) 5380,2417.7 v1(5383.85,2413.85) ; v1(5930,2680) 5930,2420 v1(5936.28,2413.72) ; v1(6480,2680) 6480,2420 v1(6488.71,2411.29) ; v1(7030,2680) 7030,2422.27 v1(7041.13,2411.13) ; v1(7580,2680) 7580,2427.12 v1(7593.56,2413.56) ; v1(8146.3,2413.7) v1(8146.3,2683.7)
  other v1: 4830,2680
D5: 2.6@465,2478.9 3.6@2119.98,2481.89 4.6@7643.56,2483.89 5.6@5433.85,2483.89 6.6@2672.41,2481.89 7.6@6538.71,2483.89 8.6@1015.12,2481.89 9.6@7091.13,2483.89 10.6@4328.99,2483.89 11.6@1567.55,2481.89 12.6@3221,2485.9 13.6@8196.3,2484.9 14.6@5986.28,2483.89 15.6@3776.56,2483.89 16.6 U1.44 | length 14491.1
  Top Layer w10: v1(465,2415) 2.6@465,2478.9 ; v1(465,2645) v1(8195,2645) ; v1(1015.12,2415.12) 8.6@1015.12,2481.89 ; v1(1567.55,2412.45) 11.6@1567.55,2481.89 ; v1(2119.98,2410.02) 3.6@2119.98,2481.89 ; v1@2672.41,2417.59 6.6@2672.41,2481.89 ; v1(3221,2421) 12.6@3221,2485.9 ; v1(3520,1540) 3544.19,1515.81 U1.44@3608.37,1515.81 ; v1(3776.56,2413.44) 15.6@3776.56,2483.89 ; v1(4328.99,2411.01) 10.6@4328.99,2483.89 ; v1(4440,1740) 4590,1890 v1(4880,1890) ; v1(4880,2400) 4880,2482.47 16.6@4881.42,2483.89 ; v1(5433.85,2416.15) 5.6@5433.85,2483.89 ; v1(5986.28,2413.72) 14.6@5986.28,2483.89 ; v1(6538.71,2411.29) 7.6@6538.71,2483.89 ; v1(7091.13,2411.13) 9.6@7091.13,2483.89 ; v1(7643.56,2413.56) 4.6@7643.56,2483.89 ; v1@8196.3,2413.7 13.6@8196.3,2484.9
  Bottom Layer w10: v1(465,2415) v1(465,2645) ; v1(1000,2650) 1000,2430.24 v1(1015.12,2415.12) ; v1(1550,2650) 1550,2430 v1(1567.55,2412.45) ; v1(2100,2650) 2100,2430 v1(2119.98,2410.02) ; v1(2650,2640) 2650,2430 v1(2670,2410) ; v1(3200,2650) 3200,2442 v1(3221,2421) ; v1(3520,1540) 4010,1540 4050,1580 4280,1580 v1(4440,1740) ; v1(3760,2650) 3760,2430 v1(3776.56,2413.44) ; v1(4328.99,2411.01) 4328.99,2648.99 v1(4330,2650) ; v1(4880,1890) v1(4880,2400) v1(4880,2650) ; v1(5430,2650) 5430,2420 v1(5433.85,2416.15) ; v1(5980,2650) 5980,2420 v1(5986.28,2413.72) ; v1(6530,2640) 6530,2420 v1(6538.71,2411.29) ; v1(7090,2650) 7090,2412.27 v1(7091.13,2411.13) ; v1(7640,2650) 7640,2417.12 v1(7643.56,2413.56) ; v1(8195,2645) 8195,2415 v1(8200,2410)
D6: 2.7@515,2478.9 3.7@2169.98,2481.89 4.7@7693.56,2483.89 5.7@5483.85,2483.89 6.7@2722.41,2481.89 7.7@6588.71,2483.89 8.7@1065.12,2481.89 9.7@7141.13,2483.89 10.7@4378.99,2483.89 11.7@1617.55,2481.89 12.7@3271,2485.9 13.7@8246.3,2484.9 14.7@6036.28,2483.89 15.7@3826.56,2483.89 16.7 U1.45 | length 14876.8
  Top Layer w10: v1(513.7,2616.3) v1(1050,2616.3) v1(2160,2616.3) v1(2700,2616.3) v1(3250,2616.3) v1(3810,2616.3) v1(5470,2616.3) v1(6020,2616.3) v1(6570,2616.3) v1(7130,2616.3) v1(7680,2616.3) v1(8246.3,2616.3) ; v1(515,2415) 2.7@515,2478.9 ; v1(1065.12,2414.88) 8.7@1065.12,2481.89 ; v1(1617.55,2412.45) 11.7@1617.55,2481.89 ; v1(2169.98,2410.02) 3.7@2169.98,2481.89 ; v1(2722.41,2412.41) 6.7@2722.41,2481.89 ; v1(3271,2421) 12.7@3271,2485.9 ; v1(3470,1510) 3483.87,1496.13 U1.45@3608.37,1496.13 ; v1(3826.56,2423.44) 15.7@3826.56,2483.89 ; v1(4378.99,2411.01) 10.7@4378.99,2483.89 ; v1(4580,1660) 5450,1660 v1(5485,1695) ; v1(4931.42,2411.42) 16.7@4931.42,2483.89 ; 5.7@5483.85,2483.89 5485,2482.74 v1(5485,2405) ; v1(6036.28,2413.72) 14.7@6036.28,2483.89 ; v1(6588.71,2411.29) 7.7@6588.71,2483.89 ; v1(7141.13,2418.87) 9.7@7141.13,2483.89 ; v1@7693.56,2420 4.7@7693.56,2483.89 ; v1(8246.3,2413.7) 13.7@8246.3,2484.9
  Bottom Layer w10: v1(513.7,2616.3) 515,2615 v1(515,2415) ; v1(1050,2616.3) 1050,2430 v1(1065.12,2414.88) ; v1(1600,2620) 1600,2430 v1(1617.55,2412.45) ; v1(2160,2616.3) 2160,2420 v1(2169.98,2410.02) ; v1(2700,2616.3) 2700,2434.81 v1(2722.41,2412.41) ; v1(3250,2616.3) 3250,2442 v1(3271,2421) ; v1(3470,1510) 3500,1510 3550,1460 3970,1460 4070,1560 4480,1560 v1(4580,1660) ; v1(3810,2616.3) 3810,2440 v1(3826.56,2423.44) ; v1(4370,2620) 4370,2420 v1(4378.99,2411.01) ; v1(4920,2620) 4920,2422.84 v1(4931.42,2411.42) ; v1(5470,2616.3) 5470,2420 v1(5485,2405) v1(5485,1695) ; v1(6020,2616.3) 6020,2430 v1(6036.28,2413.72) ; v1(6570,2616.3) 6570,2430 v1(6588.71,2411.29) ; v1(7130,2616.3) 7130,2430 v1(7141.13,2418.87) ; v1(7680,2616.3) 7680,2430 v1(7690,2420) ; v1(8246.3,2413.7) v1(8246.3,2616.3)
D7: 2.8@565,2478.9 3.8@2219.98,2481.89 4.8@7743.56,2483.89 5.8@5533.85,2483.89 6.8@2772.41,2481.89 7.8@6638.71,2483.89 8.8@1115.12,2481.89 9.8@7191.13,2483.89 10.8@4428.99,2483.89 11.8@1667.55,2481.89 12.8@3321,2485.9 13.8@8296.3,2484.9 14.8@6086.28,2483.89 15.8@3876.56,2483.89 16.8 U1.96 | length 13698.4
  Top Layer w10: v1(565,2415) 2.8@565,2478.9 ; v1(565,2585) v1(1100,2585) v1(1650,2585) v1(2200,2585) v1(2750,2585) v1(5520,2585) v1(6070,2585) v1(6630,2585) v1(7180,2585) v1(7740,2585) v1(8295,2585) ; v1@1115.12,2415.12 8.8@1115.12,2481.89 ; v1(1667.55,2417.55) 11.8@1667.55,2481.89 ; v1(2219.98,2410.02) 3.8@2219.98,2481.89 ; v1@2772.41,2412.41 6.8@2772.41,2481.89 ; v1(3321,2421) 12.8@3321,2485.9 ; 15.8@3876.56,2483.89 3876.56,2423.44 v1(3880,2420) ; v1(4140,1410) 4140,1390 4159.55,1370.45 U1.96@4159.55,866.21 ; v1(4428.99,2411.01) 10.8@4428.99,2483.89 ; v1(4570,1410) v1(4770,1410) ; v1(4980,2410) 4981.42,2411.42 16.8@4981.42,2483.89 ; v1@5533.85,2413.85 5.8@5533.85,2483.89 ; v1(6086.28,2413.72) 14.8@6086.28,2483.89 ; v1(6638.71,2411.29) 7.8@6638.71,2483.89 ; v1(7191.13,2418.87) 9.8@7191.13,2483.89 ; v1(7743.56,2416.44) 4.8@7743.56,2483.89 ; 13.8@8296.3,2484.9 8296.3,2413.7 v1(8300,2410)
  Bottom Layer w10: v1(565,2415) v1(565,2585) ; v1(1100,2585) 1100,2420 v1(1110,2410) ; v1(1650,2585) 1650,2435.1 v1(1667.55,2417.55) ; v1(2200,2585) 2200,2430 v1(2219.98,2410.02) ; v1(2750,2585) 2750,2440 v1(2780,2410) ; v1(3300,2580) 3300,2442 v1(3321,2421) ; v1(3860,2590) 3860,2440 v1(3880,2420) ; v1(4140,1410) v1(4570,1410) ; v1(4410,2590) 4410,2430 v1(4428.99,2411.01) ; v1(4770,1410) 4980,1620 v1(4980,2410) 4970,2420 v1(4970,2590) ; v1(5520,2585) 5520,2420 v1(5530,2410) ; v1(6070,2585) 6070,2430 v1(6086.28,2413.72) ; v1(6630,2585) 6630,2420 v1(6638.71,2411.29) ; v1(7180,2585) 7180,2430 v1(7191.13,2418.87) ; v1(7740,2585) 7740,2420 v1(7743.56,2416.44) ; v1(8295,2585) 8295,2415 v1(8300,2410)
D8: 2.9@615,2478.9 3.9@2269.98,2481.89 4.9@7793.56,2483.89 5.9@5583.85,2483.89 6.9@2822.41,2481.89 7.9@6688.71,2483.89 8.9@1165.12,2481.89 9.9@7241.13,2483.89 10.9@4478.99,2483.89 11.9@1717.55,2481.89 12.9@3371,2485.9 13.9@8346.3,2484.9 14.9@6136.28,2483.89 15.9@3926.56,2483.89 16.9 U1.97 | length 14495.8
  Top Layer w10: v1(600,2560) v1(1150,2560) v1(1700,2560) v1(2250,2560) v1(2800,2560) 3287.87,2560 3290.59,2557.28 v1@4450,2557.28 ; v1(615,2415) 2.9@615,2478.9 ; v1@1165.12,2414.88 8.9@1165.12,2481.89 ; v1(1717.55,2412.45) 11.9@1717.55,2481.89 ; v1(2269.98,2410.02) 3.9@2269.98,2481.89 ; v1(2822.41,2412.41) 6.9@2822.41,2481.89 ; v1(3371,2411) 12.9@3371,2485.9 ; v1@3926.56,2413.44 15.9@3926.56,2483.89 ; U1.97@4179.24,866.21 v1(4179.24,1499.24) ; 10.9@4478.99,2483.89 4478.99,2528.29 v1@4450,2557.28 ; v1(4580,1510) 6120,1510 v1(6170,1560) ; v1(5031.42,2411.42) 16.9@5031.42,2483.89 5031.42,2525.86 v1@5000,2557.28 ; v1(5583.85,2423.85) 5.9@5583.85,2483.89 ; 14.9@6136.28,2483.89 6136.28,2393.72 6140,2390 v1(6170,2350) ; v1(6688.71,2411.29) 7.9@6688.71,2483.89 ; v1(7241.13,2411.13) 9.9@7241.13,2483.89 ; v1(7793.56,2416.44) 4.9@7793.56,2483.89 ; 13.9@8346.3,2484.9 8346.3,2413.7 v1(8350,2410) ; v1(8350,2560) 8347.28,2557.28 v1(6120,2557.28) v1@5000,2557.28 ; v1@4450,2557.28 v1@5000,2557.28
  Bottom Layer w10: v1(600,2560) 600,2430 v1(615,2415) ; v1(1150,2560) 1150,2420 v1(1160,2410) ; v1(1700,2560) 1700,2430 v1(1717.55,2412.45) ; v1(2250,2560) 2269.98,2540.02 v1(2269.98,2410.02) ; v1(2800,2560) 2822.41,2537.59 v1(2822.41,2412.41) ; v1(3350,2560) 3371,2539 v1(3371,2411) ; v1(3900,2560) 3930,2530 v1(3930,2410) ; v1(4179.24,1499.24) 4539.24,1499.24 4550,1510 v1(4580,1510) ; v1(5580,2560) 5583.85,2556.15 v1(5583.85,2423.85) ; v1(6120,2557.28) 6120,2400 v1(6170,2350) v1(6170,1560) ; v1(6670,2560) 6670,2430 v1(6688.71,2411.29) ; v1(7220,2560) 7220,2432.27 v1(7241.13,2411.13) ; v1(7770,2560) 7770,2440 v1(7793.56,2416.44) ; v1(8350,2410) v1(8350,2560)
  other v1: 4450,2560 5000,2560
DIN1-3: C48.1 K1.5 U4.3 | length 8683.1
  Top Layer w11.81: v1(93.97,2016.03) U4.3@93.97,2123.95 ; v1(350,2003) C48.1@410,2003 ; v1(540,2050) 800,2310 v1(3530,2310) ; v1(3810,2320) 3920,2320 3980,2260 5200,2260 5370,2090 v1(7490,2090) ; v1(8010,2090) 8212.6,2292.6 K1.5@8230,2292.6
  Bottom Layer w11.81: v1(93.97,2016.03) 336.97,2016.03 v1(350,2003) 350,2000 390,1960 480,1960 540,2020 v1(540,2050) ; v1(3530,2310) 3540,2300 3790,2300 v1(3810,2320) ; v1(7490,2090) v1(8010,2090)
"F CS": U1.73 U6.1 | length 446.6
  Top Layer w10: U6.1@3638.3,448 v1(3638.3,548.3) ; v1(3680,790) 3706.8,816.8 U1.73@3706.8,866.21
  Bottom Layer w10: v1(3638.3,548.3) 3638.3,748.3 v1(3680,790)
"FIFO OE": 
"FIFO RCLK": U1.134
"FIFO RRST": 
"FIFO WEN": U1.133
"FIFO WRST": 
"FSMC A6": 12.11@3421,2848.1 U1.50 | length 1738.7
  Top Layer w10: 12.11@3421,2848.1 3421,2829 v1(3470,2780) ; v1(3440,1570) 3440,1610 v1(3470,1640) ; U1.50@3608.37,1397.7 v1@3677.7,1397.7
  Bottom Layer w10: v1(3440,1570) 3440,1487.87 3470,1457.87 3482.13,1457.87 3539.27,1400.73 3679.27,1400.73 v1(3680,1400) ; v1(3470,1640) v1(3470,2780)
"FSMC A7": 15.11@3976.56,2846.09 U1.53 | length 4730.2
  Top Layer w10: U1.53@3608.37,1338.65 3698.65,1338.65 3770,1410 v1(3860,1410) ; 15.11@3976.56,2846.09 3976.56,2823.44 v1(4030,2770) ; v1(4050,2300) 4070,2280 5060,2280 v1(5070,2290) ; v1(4080,1050) v1(4080,1410) ; v1(4580,950) v1(4880,950)
  Bottom Layer w10: v1(3860,1410) v1(4080,1410) ; v1(4030,2770) 4030,2320 v1(4050,2300) ; v1(4080,1050) 4090,1040 4340,1040 4430,950 v1(4580,950) ; v1(4880,950) 4970,1040 4970,1500 5070,1600 v1(5070,2290)
"FSMC A8": 4.11@7843.56,2846.09 U1.54 | length 5227.9
  Top Layer w10: U1.54@3608.37,1318.96 3728.96,1318.96 v1(3760,1350) ; v1(4580,1350) 6480,1350 v1(6520,1310) ; 4.11@7843.56,2846.09 7843.56,2826.44 v1(7890,2780)
  Bottom Layer w10: v1(3760,1350) v1(4580,1350) ; v1(6520,1310) 6600,1310 7670,2380 7870,2380 7890,2400 v1(7890,2780)
"FSMC A9": 7.11@6738.71,2846.09 U1.55 | length 4569.5
  Top Layer w10: U1.55@3608.37,1299.28 3670.72,1299.28 3680,1290 v1(3730,1290) ; v1(4570,1290) v1(6390,1290) ; 7.11@6738.71,2846.09 6738.71,2831.29 v1(6790,2780)
  Bottom Layer w10: v1(3730,1290) v1(4570,1290) ; v1(6390,1290) 6460,1290 6790,1620 v1(6790,2780)
"FSMC A10": Designator141.2 U1.56 | length 1295.1
  Top Layer w10: Designator141.2@2724.06,2045.08 2779.14,1990 2920,1990 3340,1570 v1(3340,1550) ; v1(3490,1390) 3490,1330 3540.41,1279.59 U1.56@3608.37,1279.59
  Bottom Layer w10: v1(3340,1550) 3340,1470 3392.13,1417.87 3457.4,1417.87 3485.28,1390 v1(3490,1390)
"FSMC A11": 10.11@4528.99,2846.09 U1.57 | length 2943.1
  Top Layer w10: U1.57@3608.37,1259.91 3660.09,1259.91 3690,1230 v1(3690,1190) ; 10.11@4528.99,2846.09 4528.99,2831.01 v1(4580,2780) ; v1(4570,1140) v1(4660,1140)
  Bottom Layer w10: v1(3690,1190) 3700,1180 4310,1180 4380,1110 4540,1110 v1(4570,1140) ; v1(4580,2780) 4580,1710 4700,1590 4700,1180 v1(4660,1140)
"FSMC A12": 13.11@8396.3,2847.1 U1.87 | length 6228.6
  Top Layer w10: v1(3930,630) 3930,750 3982.39,802.39 U1.87@3982.39,866.21 ; v1(4560,790) v1(6230,790) ; 13.11@8396.3,2823.7 13.11@8396.3,2847.1 ; 13.11@8396.3,2853.7 v1(8460,2790)
  Bottom Layer w10: v1(3930,630) 3950,610 4390,610 4560,780 v1(4560,790) ; v1(6230,790) 7380,1940 8310,1940 8460,2090 v1(8460,2790)
"FSMC A13": 16.11 U1.88 | length 3498.8
  Top Layer w10: v1(3970,740) 3970,742.13 4002.07,774.2 U1.88@4002.07,866.21 ; v1(4190,730) 4220,700 5110,700 v1(5120,690) ; 16.11@5081.42,2846.09 5081.42,2818.58 v1(5130,2770)
  Bottom Layer w10: v1(3970,740) 3990,720 4180,720 v1(4190,730) ; v1(5120,690) 5130,700 v1(5130,2770)
"FSMC A14": U1.89
"FSMC A15": U1.90
"FSMC A16": U1.80
"FSMC A17": U1.81
"FSMC A18": U1.82
"FSMC D0": Designator141.6 U1.85 | length 1788.9
  Top Layer w10: Designator141.6@2724.06,1845.08 2769.14,1800 2960,1800 v1(3210,1550) ; v1(3900,980) 3943.02,936.98 U1.85@3943.02,866.21
  Bottom Layer w10: v1(3210,1550) 3210,1340 3500,1050 3830,1050 v1(3900,980)
"FSMC D1": Designator141.7 U1.86 | length 1545.4
  Top Layer w10: Designator141.7@2824.3,1745 2835,1745 3200,1380 v1(3240,1380) ; U1.86@3962.7,896.21 v1@3962.7,997.3
  Bottom Layer w10: v1(3240,1380) 3540,1080 3880,1080 v1(3960,1000)
"FSMC D2": Designator141.8 U1.114 | length 2071.5
  Top Layer w10: Designator141.8@2724.3,1745 2779.3,1690 2850,1690 3200,1340 v1(3340,1340) ; v1(4420,1040) 4443.06,1063.06 U1.114@4494.2,1063.06
  Bottom Layer w10: v1(3340,1340) 3420,1340 3610,1150 4310,1150 v1(4420,1040)
"FSMC D3": Designator141.9 U1.115 | length 1957.1
  Top Layer w10: Designator141.9@2824.06,1645.08 3179.14,1290 v1(3420,1290) ; v1(4360,1060) 4382.74,1082.74 U1.115@4494.2,1082.74
  Bottom Layer w10: v1(3420,1290) 3420,1230 3540,1110 4310,1110 v1(4360,1060)
"FSMC D4": Designator141.10 U1.58 | length 1052
  Top Layer w10: Designator141.10@2724.06,1645.08 2779.14,1590 2850,1590 3199.78,1240.22 U1.58@3608.37,1240.22
"FSMC D5": Designator141.11 U1.59 | length 918.7
  Top Layer w10: Designator141.11@2824.06,1545.08 3148.6,1220.54 U1.59@3608.37,1220.54
"FSMC D6": Designator141.12 U1.60 | length 1026.9
  Top Layer w10: Designator141.12@2724.06,1545.08 2779.14,1490 2830.75,1490 3119.9,1200.85 U1.60@3608.37,1200.85
"FSMC D7": Designator141.13 U1.63 | length 909.9
  Top Layer w10: Designator141.13@2824.06,1445.08 3127.35,1141.8 U1.63@3608.37,1141.8
"FSMC D8": Designator141.14 U1.64 | length 1018.1
  Top Layer w10: Designator141.14@2724.06,1445.08 2779.14,1390 2830.75,1390 3098.64,1122.11 U1.64@3608.37,1122.11
"FSMC D9": Designator141.15 U1.65 | length 884.8
  Top Layer w10: Designator141.15@2824.06,1345.08 3066.72,1102.43 U1.65@3608.37,1102.43
"FSMC D10": Designator141.16 U1.66 | length 993
  Top Layer w10: Designator141.16@2724.06,1345.08 2769.14,1300 2830,1300 2904.25,1225.75 2914.81,1225.75 3057.81,1082.74 U1.66@3608.37,1082.74
"FSMC D11": Designator141.17 U1.67 | length 859.7
  Top Layer w10: Designator141.17@2824.06,1245.08 2861.27,1207.87 2907.4,1207.87 3052.22,1063.06 U1.67@3608.37,1063.06
"FSMC D12": Designator141.18 U1.68 | length 967.9
  Top Layer w10: Designator141.18@2724.06,1245.08 2779.14,1190 2900,1190 3046.63,1043.37 U1.68@3608.37,1043.37
"FSMC D13": Designator141.19 U1.77 | length 1609.6
  Top Layer w10: Designator141.19@2824.06,1145.08 2894.92,1145.08 v1(3030,1010) ; v1(3100,650) 3820,650 3830,660 3830,770 3785.54,814.46 U1.77@3785.54,866.21
  Bottom Layer w10: v1(3030,1010) 3100,940 v1(3100,650)
"FSMC D14": Designator141.20 U1.78 | length 1797.6
  Top Layer w10: Designator141.20@2724.06,1145.08 2724.06,1115.94 2750,1090 2890,1090 v1(2960,1020) ; v1(3060,620) 3830,620 3860,650 3860,765.28 3805.22,820.05 U1.78@3805.22,866.21
  Bottom Layer w10: v1(2960,1020) 3060,920 v1(3060,620)
"FSMC D15": Designator141.21 U1.79 | length 1729.9
  Top Layer w10: Designator141.21@2824.06,1045.08 2899.14,970 v1(2960,970) ; v1(3010,580) 3820,580 3890,650 3890,760.56 3824.91,825.65 U1.79@3824.91,866.21
  Bottom Layer w10: v1(2960,970) 3010,920 v1(3010,580)
"FSMC NE3": 
"FSMC NE4": Designator141.1 U1.127 | length 2043.1
  Top Layer w10: Designator141.1@2824.06,2045.08 2914.92,2045.08 3400,1560 v1(3400,1550) ; v1@4391.04,1318.96 U1.127@4494.2,1318.96
  Bottom Layer w10: v1(3400,1550) 3400,1470 3430,1440 3474.72,1440 3520,1394.72 3520,1388.16 3519.27,1387.42 3519.27,1360.73 3560,1320 v1(4390,1320)
"FSMC NOE": Designator141.4 U1.118 | length 2154.5
  Top Layer w10: Designator141.4@2724.06,1945.08 2779.14,1890 2920,1890 3250,1560 v1(3250,1550) ; v1@4391.8,1141.8 U1.118@4494.2,1141.8
  Bottom Layer w10: v1(3250,1550) 3250,1470 3350,1370 3420,1370 3570,1220 4310,1220 v1(4390,1140)
"FSMC NWE": Designator141.3 U1.119 | length 2053.3
  Top Layer w10: Designator141.3@2824.06,1945.08 2914.92,1945.08 3290,1570 v1(3290,1550) ; v1(4400,1180) 4418.52,1161.48 U1.119@4494.2,1161.48
  Bottom Layer w10: v1(3290,1550) 3290,1470 3360,1400 3420,1400 3570,1250 4320,1250 4390,1180 v1(4400,1180)
GBUF: 